# Altium PCB PCB_PCB-Business-Card_2026-10-04.pcbdoc
Units mil, origin at the board's own origin, x right, y up, seen from the top; angles counter-clockwise.
Board outline 4509.99 x 3010 mil, 2 copper layers (Top Layer, Bottom Layer); 14 components, 8 nets, 16 pads, 1 vias.
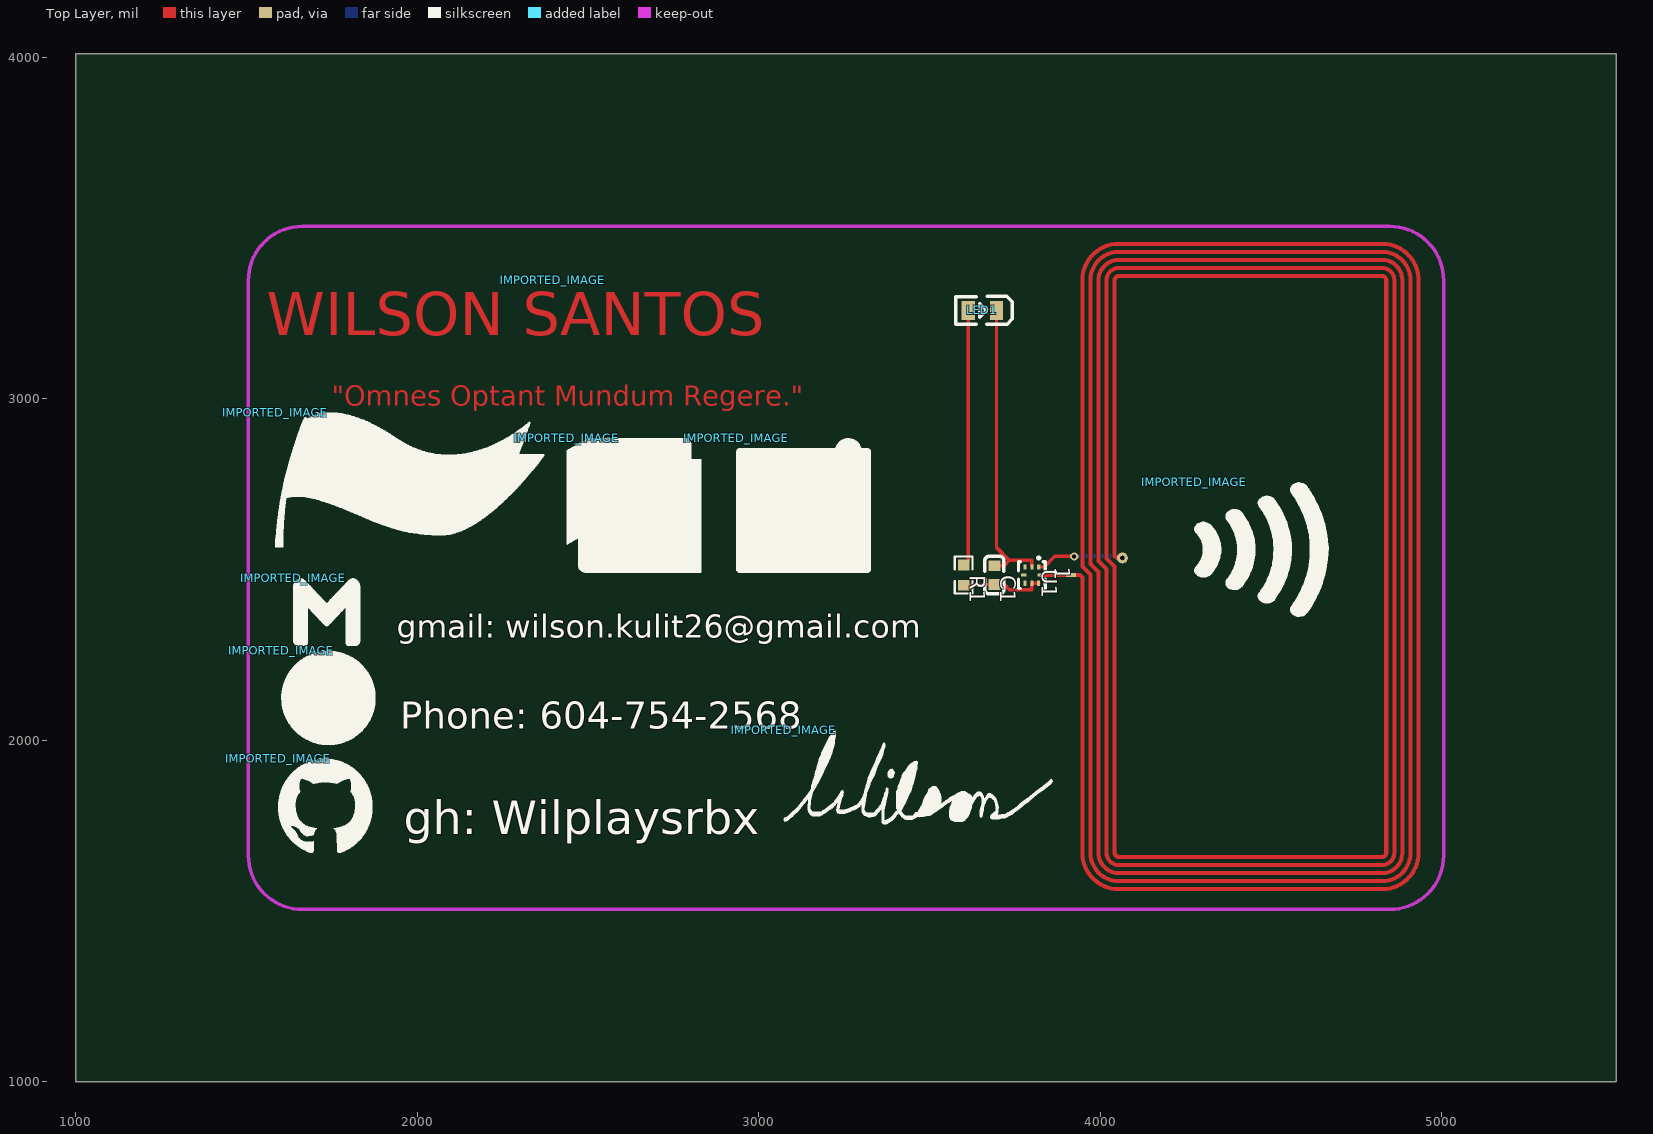
[diagram p0: Top Layer view]
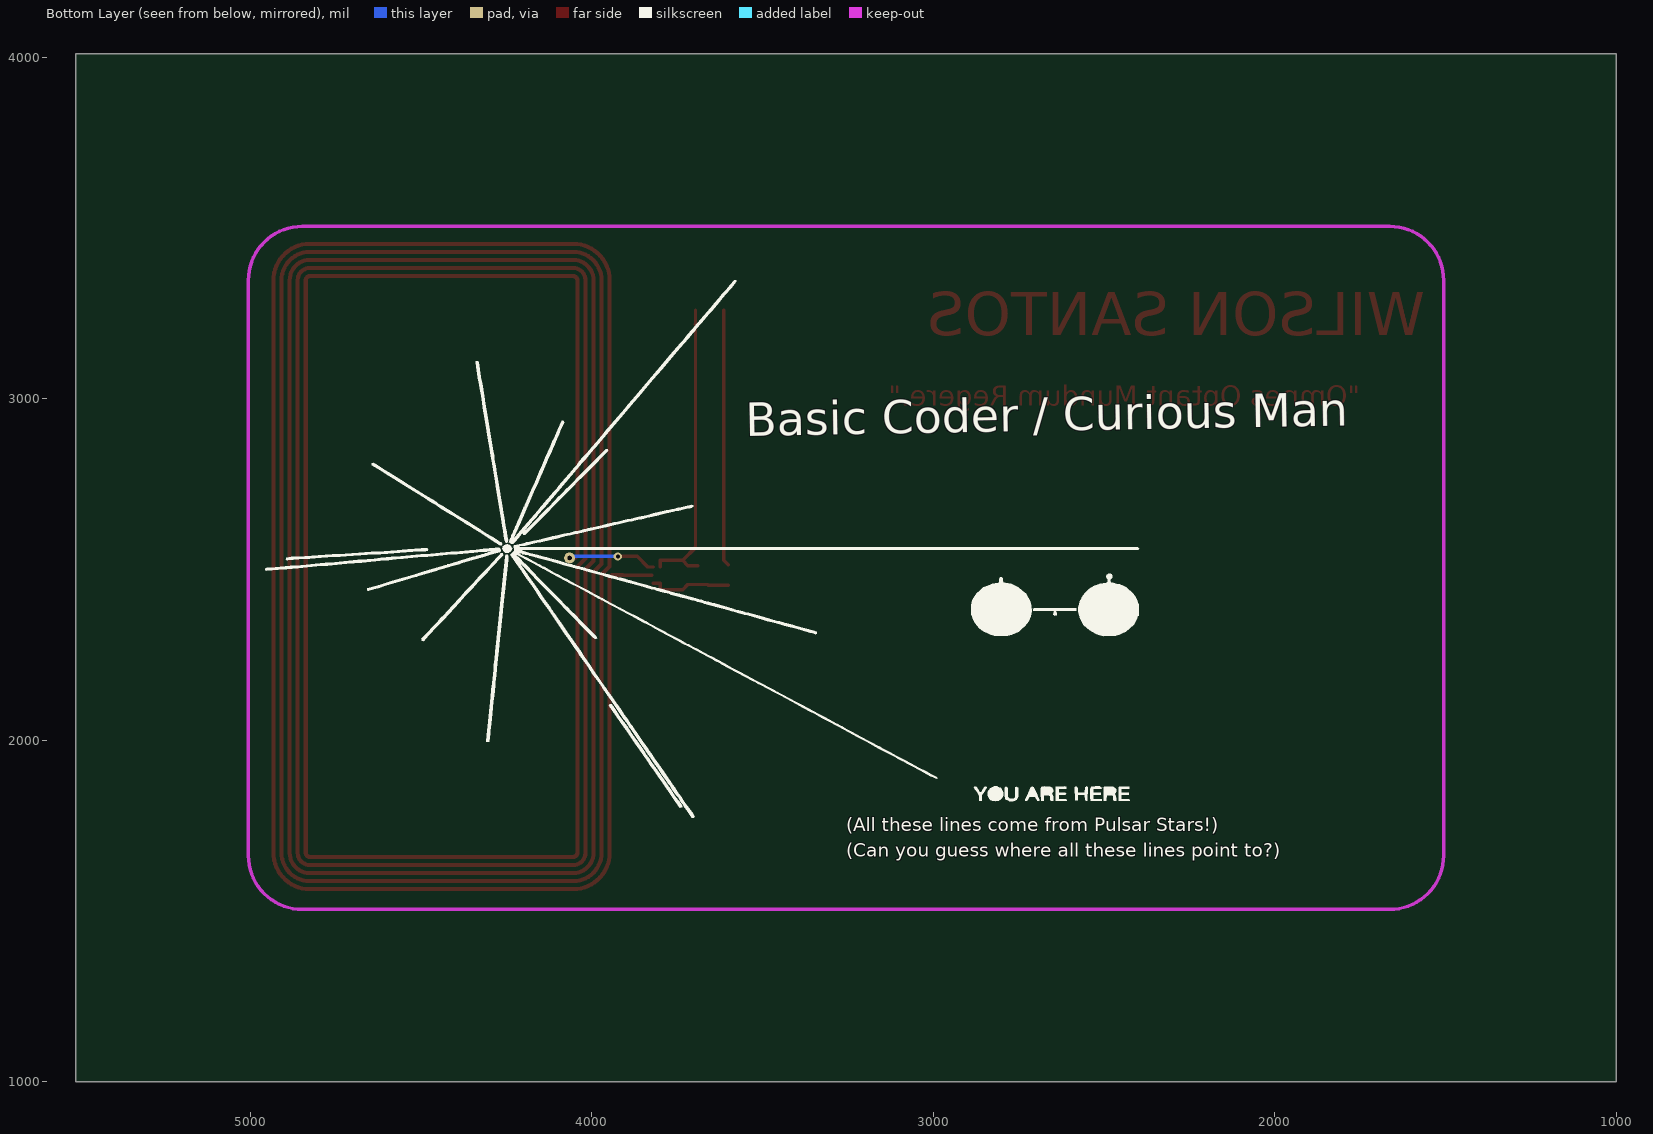
[diagram p1: Bottom Layer view, seen from below]

## Layer stack, top to bottom
Top Layer: signal copper (thickness not stored)
Dielectric: dielectric 12.6, FR-4, Dk 4.8
Bottom Layer: signal copper (thickness not stored)

## Board outline
5509.99,1000 1000,1000 1000,4010 5509.99,4010

## Components (designator, comment, footprint, x,y, rotation, side; value= is the part's Value field where it differs from the comment)
1 "25X48MM_NFC_ANTENNA" 25X48MM_NFC_ANTENNA 4439.41,2508.98 r90 top
C1 "220nF" C0603 3689.41,2483.98 r270 top
IMPORTED_IMAGE "IMPORTED_IMAGE" IMPORTED_IMAGE 2396.87,3347.94 r0 top
IMPORTED_IMAGE "IMPORTED_IMAGE" IMPORTED_IMAGE 4274.42,2755.2 r0 top
IMPORTED_IMAGE "IMPORTED_IMAGE" IMPORTED_IMAGE 1584.14,2959.47 r0 top
IMPORTED_IMAGE "IMPORTED_IMAGE" IMPORTED_IMAGE 1592.56,1945.83 r0 top
IMPORTED_IMAGE "IMPORTED_IMAGE" IMPORTED_IMAGE 1635.96,2474.11 r0 top
IMPORTED_IMAGE "IMPORTED_IMAGE" IMPORTED_IMAGE 1601.62,2261.77 r0 top
IMPORTED_IMAGE "IMPORTED_IMAGE" IMPORTED_IMAGE 2933.85,2884.19 r0 top
IMPORTED_IMAGE "IMPORTED_IMAGE" IMPORTED_IMAGE 2437.39,2884.92 r0 top
IMPORTED_IMAGE "IMPORTED_IMAGE" IMPORTED_IMAGE 3072.68,2029.25 r0 top
LED1 "17-21SUYC/TR8" LED0805-R-RD 3654.41,3258.98 r180 top
R1 "47Ω" R0603 3599.41,2483.98 r270 top
U1 "NT3H2111W0FHKH" XQFN-8_L1.6-W1.6-P0.50-BL_NT3H2111W0FHKH 3799.41,2483.98 r270 top

## Footprints (in the part's own frame and the unit in brackets; to place one, negate y for a bottom-side part, rotate by r counter-clockwise, add the part's x,y. Pads: shape width x height; smd on the part's side, far side on the other; paste and mask are expansions set on the pad)
25X48MM_NFC_ANTENNA [mil]
  rect 11.81x29.53 smd paste+0 mask+2: P$1(-25,525)
  round 31.81 hole 11.82 paste+0 mask+2: P$2(25,375)
  Top Layer lines w11.81: -25,530 -25,525 -25,498.62 -31.5,492.13 -838.58,492.13 ccw(c-838.58,385.83) -944.88,385.83 -944.88,-385.83 ccw(c-838.58,-385.83) -838.58,-492.13 838.58,-492.12 ccw(c838.58,-385.83) 944.88,-385.83 944.88,385.83 ccw(c838.58,385.83) 838.58,492.13 0,492.13 -23.62,468.5 -838.58,468.5 ccw(c-838.58,385.82) -921.26,385.83 -921.26,-385.83 ccw(c-838.58,-385.82) -838.58,-468.5 838.58,-468.5 ccw(c838.58,-385.82) 921.26,-385.83 921.26,385.83 ccw(c838.58,385.82) 838.58,468.5 7.87,468.5 -15.75,444.88 -838.58,444.88 ccw(c-838.59,385.83) -897.64,385.83 -897.64,-385.83 ccw(c-838.59,-385.83) -838.58,-444.88 838.58,-444.88 ccw(c838.59,-385.83) 897.64,-385.83 897.64,385.83 ccw(c838.59,385.83) 838.58,444.88 15.75,444.88 -7.87,421.26 -838.58,421.26 ccw(c-838.58,385.83) -874.01,385.83 -874.01,-385.83 ccw(c-838.58,-385.83) -838.58,-421.26 838.58,-421.26 ccw(c838.58,-385.83) 874.01,-385.83 874.01,385.83 ccw(c838.58,385.83) 838.58,421.26 23.62,421.26 0,397.64 -838.58,397.64 ccw(c-838.58,385.83) -850.39,385.83 -850.39,-385.83 ccw(c-838.58,-385.83) -838.58,-397.64 838.58,-397.64 ccw(c838.58,-385.83) 850.39,-385.83 850.39,385.83 ccw(c838.58,385.83) 838.58,397.64 31.5,397.64 25,391.14 25,375
C0603 [mm]
  rect 0.8x0.9 smd paste+0 mask+0.051: 1(-0.7,0) 2(0.7,0)
  silkscreen extent -1.39,-0.71 1.39,0.71
IMPORTED_IMAGE [mil]
LED0805-R-RD [mm]
  rect 1x1.4 smd paste+0 mask+0.051: 1(1.05,0) 2(-1.05,0)
  silkscreen extent -2.22,-1.04 1.99,1.01
R0603 [mil]
  rect 31.75x34.02 smd paste-3937.01 mask+2: 1(-29.65,0) 2(29.66,0)
  silkscreen extent -55,-26 55,26
XQFN-8_L1.6-W1.6-P0.50-BL_NT3H2111W0FHKH [mm]
  rect 0.4x0.28 smd paste+0 mask+0.051: 1(-0.6,0.5)
  rect 0.4x0.22 smd paste+0 mask+0.051: 2(-0.6,0) 3(-0.6,-0.5) 5(0.6,-0.5) 6(0.6,0) 7(0.6,0.5)
  rect 0.22x0.4 smd paste+0 mask+0.051: 4(0,-0.6) 8(0,0.6)
  silkscreen extent -1.33,-1 1,1

## Via types
v1: diameter 24, hole 12, Top Layer to Bottom Layer, tented both sides, 1 vias

## Nets (pads, with @x,y where several pads share a name; then routed paths per layer and width w, separated by ;. In a path a pad name is that pad's centre, name@x,y a point inside that pad or via, vN(x,y) a via of type N, cw(c..) or ccw(c..) an arc to the next point about the centre after c; other vN are vias at no path point)
LED1_1: LED1.1 R1.1 | length 799.6
  Top Layer w10: R1.1 3613.06,2527.29 LED1.1 3613.06,3210.41
U1_1: 1.P$2 U1.1 | length 1110.9
  Top Layer w10: U1.1 3835.62,2507.6 3866.47,2538.45 v1(3923.12,2538.45) ; 4053.58,3359.37 4053.49,3359.37 4052.52,3359.32 4051.56,3359.19 4050.61,3358.99 4049.68,3358.71 4048.78,3358.35 4047.9,3357.92 4047.07,3357.42 4046.28,3356.85 4045.55,3356.22 4044.86,3355.53 4044.24,3354.78 4043.67,3353.99 4043.18,3353.16 4042.75,3352.28 4042.4,3351.38 4042.13,3350.44 4041.93,3349.49 4041.81,3348.53 4041.77,3347.56 4041.77,2540.48 4048.27,2533.98 1.P$2
  Bottom Layer w10: v1(3923.12,2538.45) 4059.94,2538.45 1.P$2
U1_2: C1.1 LED1.2 U1.2 | length 923.4
  Top Layer w10: C1.1 3718.14,2511.54 3733.48,2526.88 ; 3696.46,3218.98 3695.76,3219.68 LED1.2 3695.76,2564.6 3733.48,2526.88 ; U1.2 3799.41,2526.49 3799.02,2526.88 3733.48,2526.88
U1_3: U1.3
U1_4: U1.4
U1_5: U1.5
U1_6: C1.2 R1.2 U1.6 U1.7 | length 245.7
  Top Layer w10: R1.2 3658.58,2454.32 3660.68,2456.42 C1.2 3718.14,2456.42 3733.19,2441.37 3799.3,2441.37 3799.41,2441.48 U1.6 U1.7
U1_8: 1.P$1 U1.8 | length 91.4
  Top Layer w10: U1.8 1.P$1

## Keep-outs
Keep-Out Layer:
  lines w10: 1505,1662.48 ccw(c1662.48,1662.48) 1662.48,1505 ; 1505,3347.52 cw(c1662.48,3347.52) 1662.48,3505 ; 4847.51,1505 ccw(c4847.51,1662.48) 5004.99,1662.48 ; 4847.51,3505 cw(c4847.51,3347.52) 5004.99,3347.52

## Other copper
Top Layer:
  text "WILSON SANTOS" at 1559.41,3143.98 h216.53
  text "\"Omnes Optant Mundum Regere.\"" at 1749.41,2979.45 h59.05

## Silkscreen, mask and mechanical layers (free items; w line width, h text height)
Top Overlay:
  text "gmail: wilson.kulit26@gmail.com" at 1939.41,2300.51 h66.93
  text "Phone: 604-754-2568" at 1949.41,2034.61 h78.74
  text "gh: Wilplaysrbx" at 1959.41,1724.76 h98.42
Bottom Overlay:
  text "Basic Coder / Curious Man" at 3548.55,2889.77 h98.42 r359
  text "(All these lines come from Pulsar Stars!)" at 3254.41,1734.29 h39.37
  text "(Can you guess where all these lines point to?)" at 3254.41,1659.29 h39.37
Top Solder:
  text "WILSON SANTOS" at 1559.41,3138.98 h219.29
  text "\"Omnes Optant Mundum Regere.\"" at 1749.41,2979.45 h59.05